# Altium PCB PCB1.PcbDoc
Units mm, origin at the board's own origin, x right, y up, seen from the top; angles counter-clockwise.
Board outline 52.7 x 67.69 mm, 4 copper layers (Top Layer, Internal Plane 1, Internal Plane 2, Bottom Layer), stack 0.462 mm thick; 20 components, 14 nets, 54 pads, 0 vias.
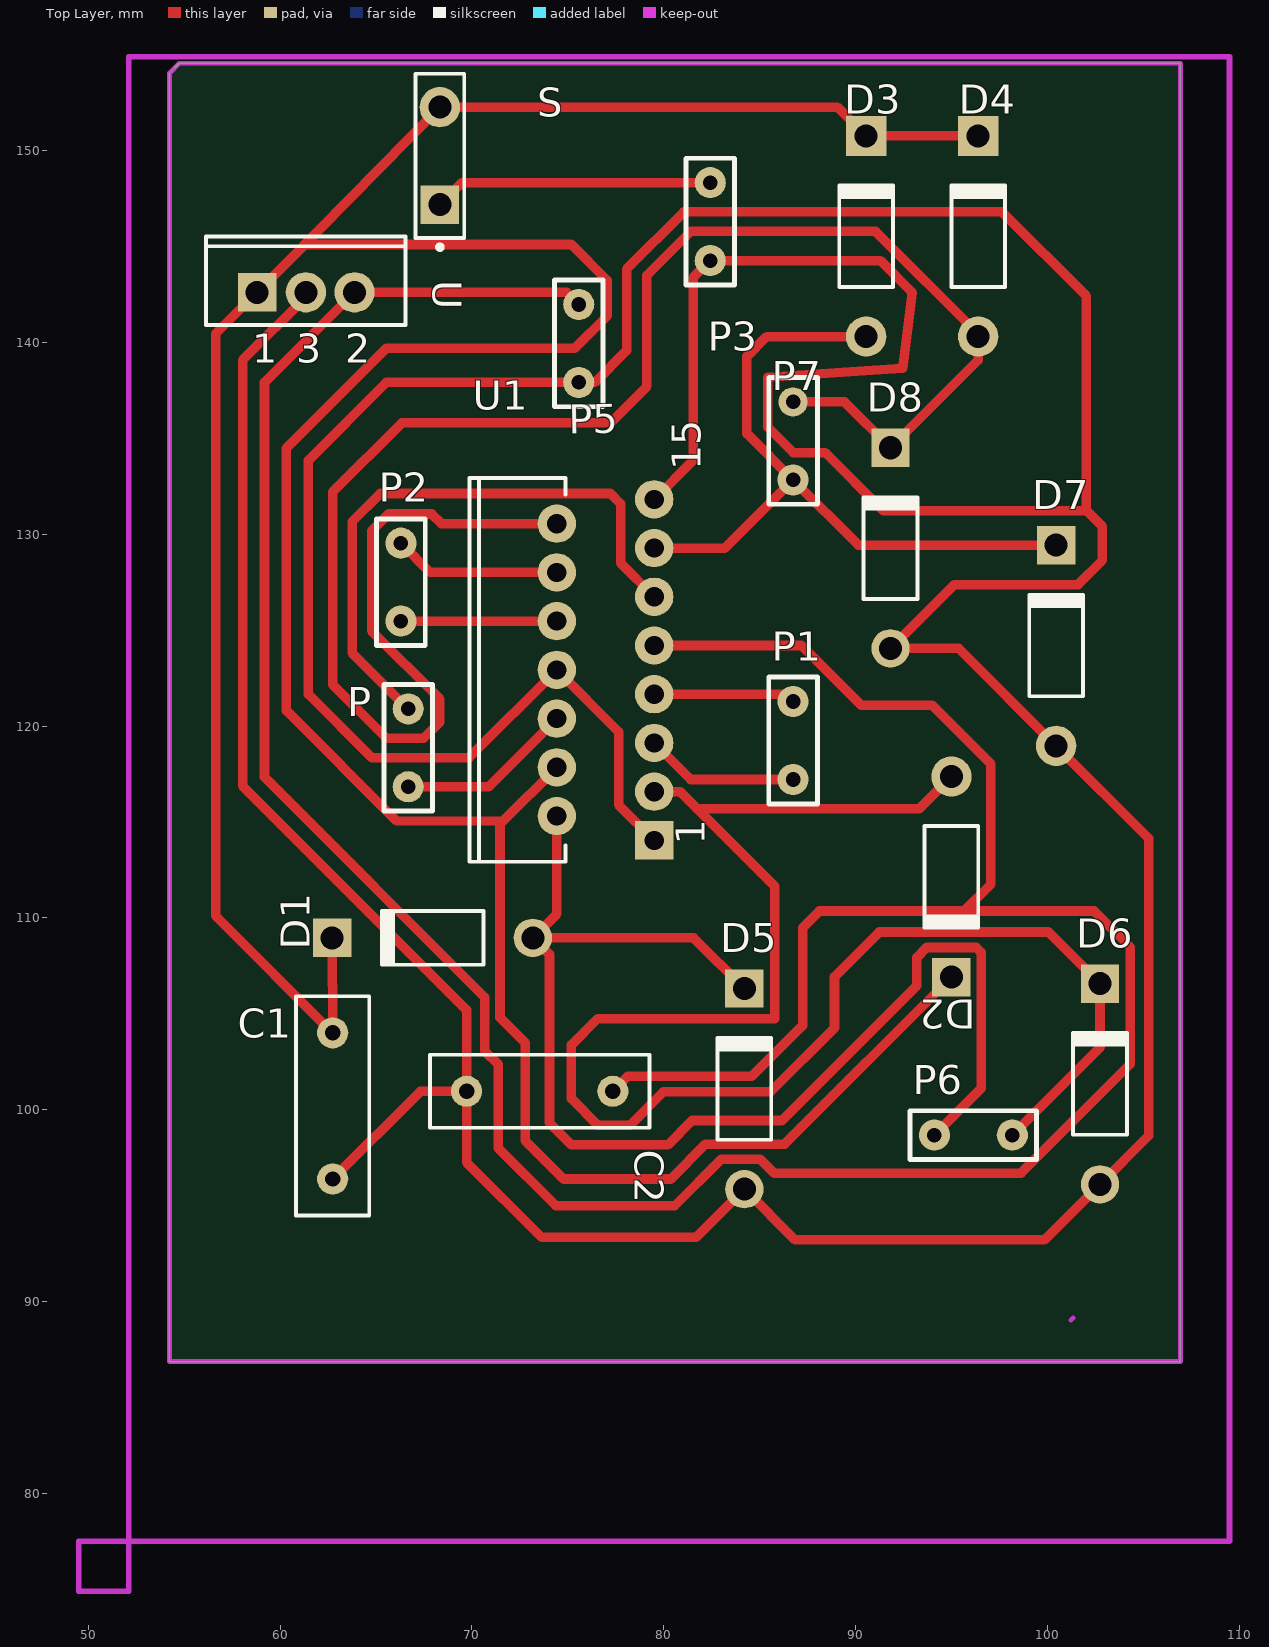
[diagram p0: Top Layer view]
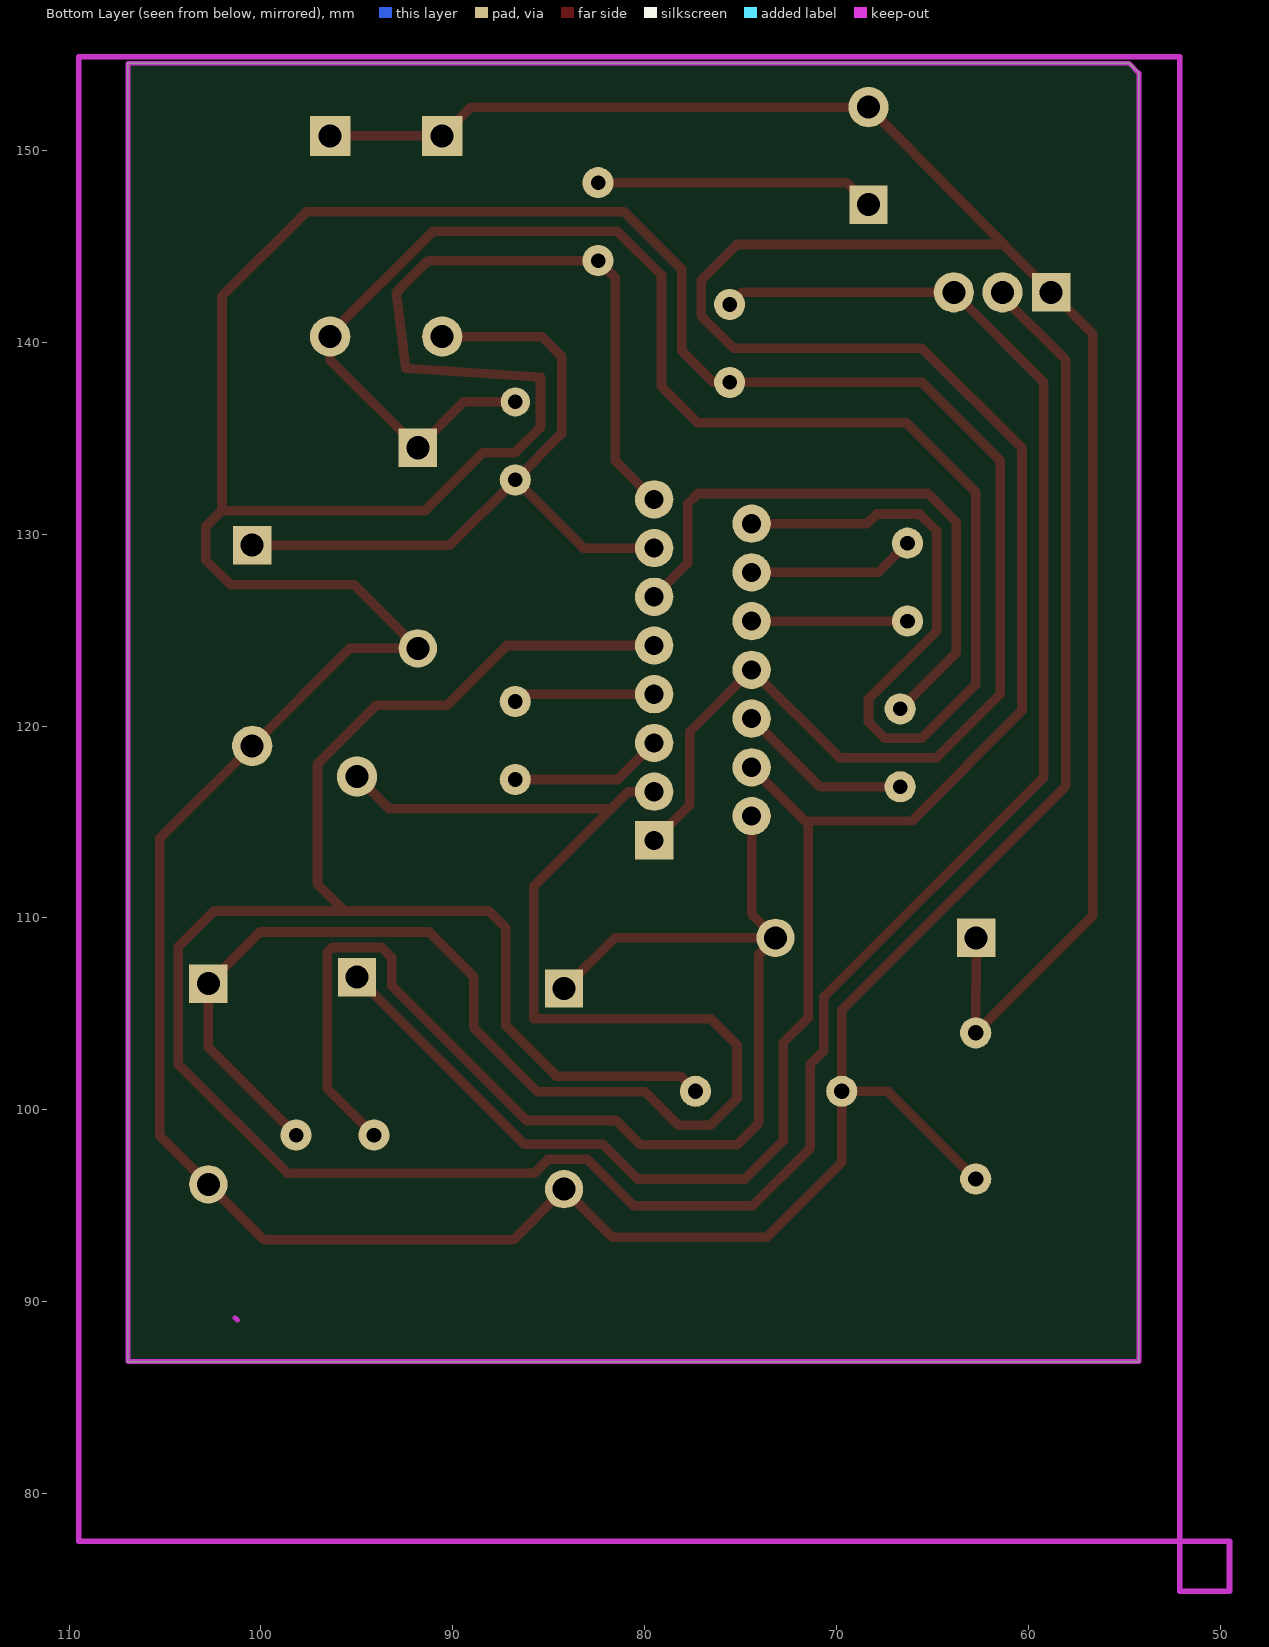
[diagram p1: Bottom Layer view, seen from below]
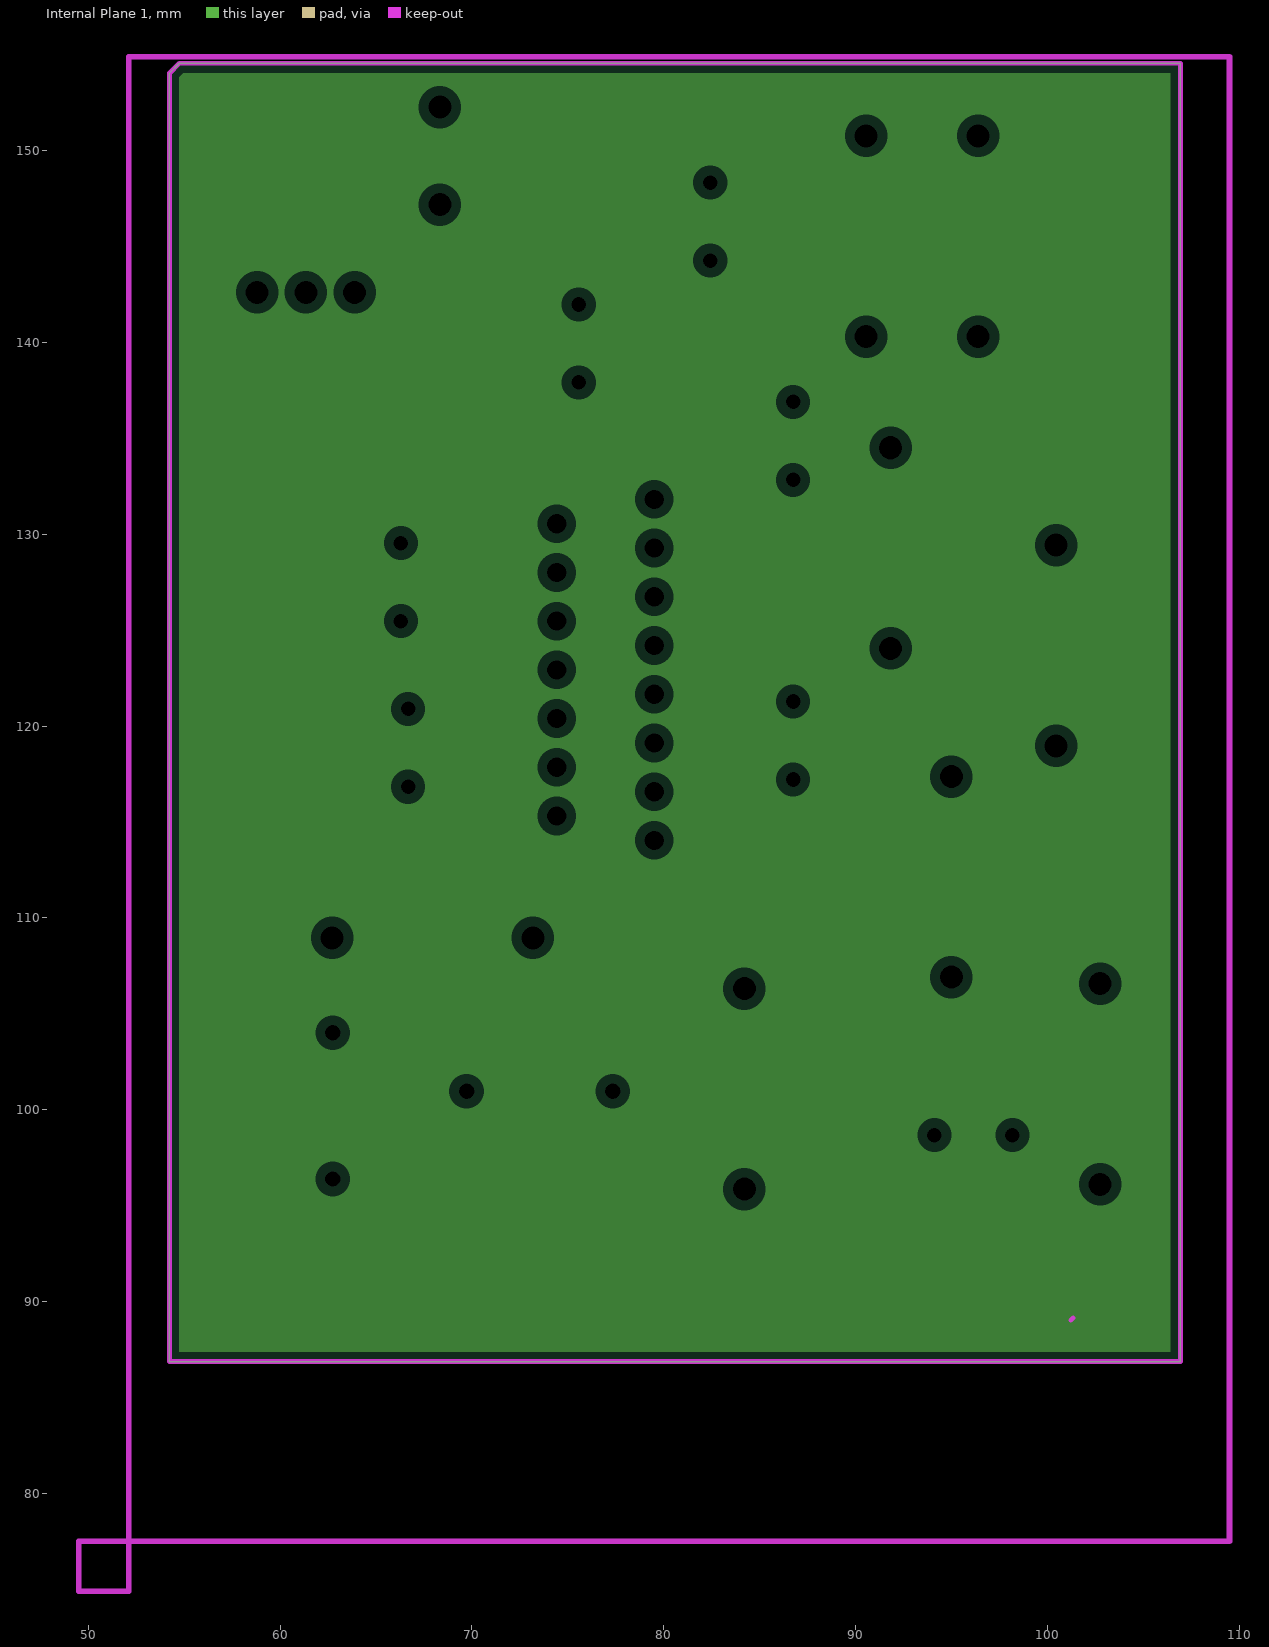
[diagram p2: Internal Plane 1, clearances drawn from the general rule]
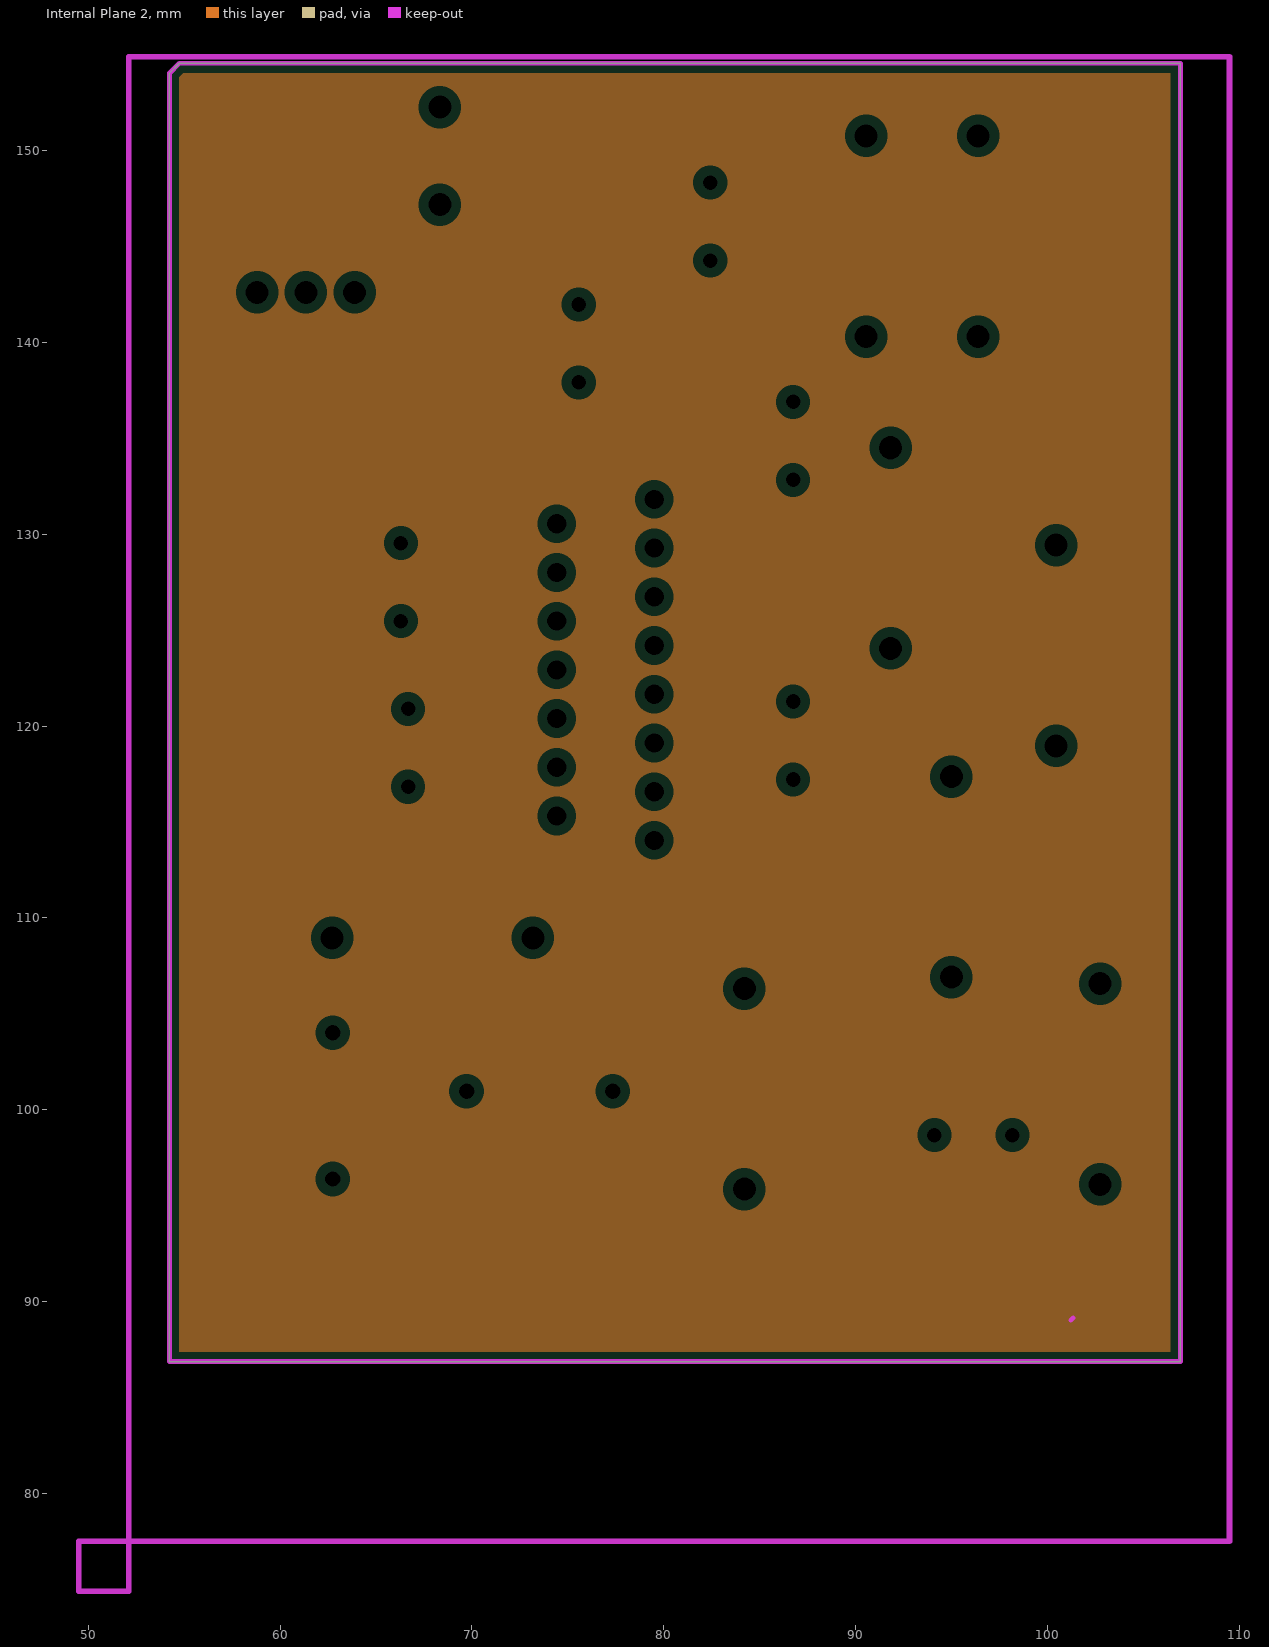
[diagram p3: Internal Plane 2, clearances drawn from the general rule]

## Layer stack, top to bottom
Top Solder: solder mask 0.0102, Solder Resist, Dk 3.5
Top Layer: signal copper 0.0356
Internal Plane 1: plane copper 0.0356
Internal Plane 2: plane copper 0.0356
Dielectric 1: dielectric 0.32, FR-4, Dk 4.8
Bottom Layer: signal copper 0.0356
Bottom Solder: solder mask 0.0102, Solder Resist, Dk 3.5

## Board outline
54.229,86.868 54.229,154.051 54.737,154.559 106.934,154.559 106.934,86.868

## Design rules (kind name [scope] priority, off if disabled: settings)
Clearance [All] p1: gap=0.3
PlaneClearance [All] p1: clearance=0.508
PlaneConnect [All] p1: planeconnectstyle=Relief reliefexpansion=0.508 reliefentries=4 reliefconductorwidth=0.254 reliefairgap=0.254
PolygonConnect [All] p1: connectstyle=Relief reliefconductorwidth=0.254 reliefentries=4 polygonreliefangle="90 Angle" airgapwidth=0.254
RoutingLayers [All] p1: top layer_v5=TRUE bottom layer_v5=FALSE
RoutingVias [All] p1: holewidth=0.6 width=1 viastyle="Through Hole" minholewidth=0.711 minwidth=1.27 maxholewidth=0.711 maxwidth=1.27
SMDNeckDown [All] p1: percent=50.000
SolderMaskExpansion [All] p1: expansion=0.102
Width [All] p1: maxlimit=0.8 minlimit=0.2 preferedwidth=0.5 bottomlayer_prefwidth=0.4 minimp=50.000000 maximp=50.000000 favimp=50.000000
27 further rules are at their usual default settings.

## Components (designator, comment, footprint, x,y, rotation, side; value= is the part's Value field where it differs from the comment)
C1 "Cap" RAD-0.3#1 62.738,100.203 r90 top
C2 "Cap" RAD-0.3#2 73.533,100.965 r0 top
D1 "Diode 1N4007" DO-41#1 67.945,108.966 r180 top
D2 "Diode 1N4007" DO-41#2 94.996,112.141 r270 top
D3 "Diode 1N4007" DO-41#3 90.551,145.542 r90 top
D4 "Diode 1N4007" DO-41#3 96.393,145.542 r90 top
D5 "Diode 1N4007" DO-41#1 84.201,101.092 r90 top
D6 "Diode 1N4007" DO-41#1 102.743,101.346 r90 top
D7 "Diode 1N4007" DO-41#2 100.457,124.206 r90 top
D8 "Diode 1N4007" DO-41#1 91.821,129.286 r90 top
P "PWM" header#1 66.675,120.904 r270 top
P1 "Header 2" header#1 86.741,121.285 r270 top
P2 "Header 2" header#1 66.294,129.54 r270 top
P3 "+9V" header#1 82.423,144.272 r90 top
P5 "Header 2" header#1 75.565,141.986 r270 top
P6 "Header 2" header#1 94.107,98.679 r0 top
P7 "Header 2" header#2 86.741,132.842 r90 top
S "SW-PB" SPST-2 68.326,149.733 r90 top
U "L7805CV" TO220ABN 61.341,142.621 r0 top
U1 "L298N" Multiwatt15V 76.962,122.936 r90 top

## Footprints (in the part's own frame and the unit in brackets; to place one, negate y for a bottom-side part, rotate by r counter-clockwise, add the part's x,y. Pads: shape width x height; smd on the part's side, far side on the other; paste and mask are expansions set on the pad)
DO-41#1 [mm] "Diode, Axial; Body 5.2 x 2.7 mm (LxDia. max), Lead Dia. 0.86 mm (max)"
  round 2 hole 1.2: 1(-5.23,0)
  rect 2x2 hole 1.2: 2(5.23,0)
  silkscreen extent -2.65,-1.4 2.75,1.4
DO-41#2 [mm] "Diode, Axial; Body 5.2 x 2.7 mm (LxDia. max), Lead Dia. 0.86 mm (max)"
  round 2.1 hole 1.2: 1(-5.23,0)
  rect 2x2 hole 1.2: 2(5.23,0)
  silkscreen extent -2.65,-1.4 2.75,1.4
DO-41#3 [mm] "Diode, Axial; Body 5.2 x 2.7 mm (LxDia. max), Lead Dia. 0.86 mm (max)"
  round 2.1 hole 1.2: 1(-5.23,0)
  rect 2.1x2.1 hole 1.2: 2(5.23,0)
  silkscreen extent -2.65,-1.4 2.75,1.4
header#1 [mil]
  round 63.94 hole 30: 1(0,0) 2(160,0)
  silkscreen extent -50,-50 210,50
header#2 [mil]
  round 63.94 hole 30: 1(0,0)
  round 60 hole 30: 2(160,0)
  silkscreen extent -50,-50 210,50
Multiwatt15V [mm] "TO, Thru-Hole, Vertical, Heatsink Mounted; 15 Bent Staggered Leads; Pitch 1.27 mm"
  rect 2x2 hole 1: 1(-8.89,-2.54)
  round 2 hole 1: 2(-7.62,2.54) 3(-6.35,-2.54) 4(-5.08,2.54) 5(-3.81,-2.54) 6(-2.54,2.54) 7(-1.27,-2.54) 8(0,2.54) 9(1.27,-2.54) 10(2.54,2.54) 11(3.81,-2.54) 12(5.08,2.54) 13(6.35,-2.54) 14(7.62,2.54) 15(8.89,-2.54)
  silkscreen extent -10,2.09 10,7.09
RAD-0.3#1 [mm] "Radial Cap, Thru-Hole; 2 Leads; 0.3 in Pin Spacing"
  round 1.625 hole 0.8: 1(-3.81,0) 2(3.81,0)
  silkscreen extent -5.71,-1.91 5.71,1.91
RAD-0.3#2 [mm] "Radial Cap, Thru-Hole; 2 Leads; 0.3 in Pin Spacing"
  round 1.625 hole 0.8: 1(-3.81,0)
  round 1.624 hole 0.8: 2(3.81,0)
  silkscreen extent -5.71,-1.91 5.71,1.91
SPST-2 [mm] "Switch; 2 Leads"
  rect 2x2 hole 1.2: 1(-2.54,0)
  round 2.1 hole 1.2: 2(2.54,0)
  silkscreen extent -4.89,-1.27 4.28,1.27
TO220ABN [mm] "TO, Thru-Hole, Vertical, Heatsink Mounted; 3 In-Line Leads; Pitch 2.54 mm; Pin sequence 1, 3, 2"
  rect 2x2 hole 1.2: 1(-2.54,0)
  round 2.1 hole 1.2: 2(2.54,0) 3(0,0)
  silkscreen extent -5.2,-1.7 5.2,2.9

## Part data
C1 C2: "Capacitor"
D1 D2 D3 D4 D5 D6 D7 D8: "1 Amp General Purpose Rectifier"
P P3: library part "Header 2", "Header, 2-Pin"
P1 P2 P5 P6 P7: "Header, 2-Pin"
S: "Switch"
U: "Positive Voltage Regulator"
U1: "Dual Full Bridge Driver"

## Nets (pads, with @x,y where several pads share a name; then routed paths per layer and width w, separated by ;. In a path a pad name is that pad's centre, name@x,y a point inside that pad or via, vN(x,y) a via of type N, cw(c..) or ccw(c..) an arc to the next point about the centre after c; other vN are vias at no path point)
GND: C1.1 C2.1 D5.1 D6.1 D7.1 D8.1 P3.1 P5.2 U1.1 U1.8 U1.15 U.3 | length 308.7
  Top Layer w0.5: U.3 61.341,142.383 58.039,139.081 58.039,116.891 69.723,105.207 C2.1 ; C1.1 67.31,100.965 C2.1 ; U1.1 77.648,115.9 77.648,119.71 U1.8 69.85,118.364 64.77,118.364 61.468,121.666 61.468,133.858 65.532,137.922 P5.2 76.411,137.922 78.067,139.578 78.067,143.828 81.051,146.812 97.638,146.812 102.032,142.418 102.032,131.242 ; U1.15 81.534,133.858 81.534,143.383 P3.1 91.288,144.272 92.953,142.607 92.456,138.659 85.429,138.185 85.429,135.585 86.75,134.264 88.417,134.264 91.44,131.242 102.032,131.242 ; C2.1 69.723,97.259 73.637,93.345 81.684,93.345 D5.1 86.845,93.218 99.845,93.218 D6.1 105.283,98.656 105.283,114.15 D7.1 95.377,124.056 D8.1 95.146,127.381 101.6,127.381 102.87,128.651 102.87,130.404 102.032,131.242
NetC2_2: C2.2 P5.1 U1.9 U.2 | length 170.5
  Top Layer w0.5: P5.1 74.93,142.621 U.2 59.182,137.922 59.182,117.348 70.663,105.867 70.663,103.073 71.374,102.362 71.374,97.993 74.371,94.996 80.571,94.996 82.987,97.412 85.036,97.412 85.75,96.698 98.628,96.698 104.318,102.387 104.318,108.483 102.438,110.363 95.656,110.363 ; C2.2 78.13,101.752 84.595,101.752 87.236,104.394 87.236,109.487 88.113,110.363 95.656,110.363 ; U1.9 87.173,124.206 90.297,121.082 94.005,121.082 97.053,118.034 97.053,111.76 95.656,110.363
NetD1_1: D1.1 D5.2 P6.1 U1.2 | length 67.7
  Top Layer w0.5: U1.2 74.422,110.213 D1.1 ; D5.2 81.557,108.966 D1.1 ; P6.1 96.546,101.118 96.546,108.204 96.289,108.461 93.703,108.461 93.192,107.95 93.192,106.477 86.156,99.441 81.48,99.441 80.21,98.171 75.184,98.171 74.041,99.314 74.041,108.1 D1.1
NetD2_1: D2.1 D6.2 P6.2 U1.3 | length 87.9
  Top Layer w0.5: U1.3 80.848,116.586 81.737,115.697 ; D2.1 93.322,115.697 81.737,115.697 ; P6.2 102.743,103.251 D6.2 100.048,109.271 91.237,109.271 88.9,106.934 88.9,104.267 85.573,100.94 79.985,100.94 78.232,99.187 76.581,99.187 75.184,100.584 75.184,103.378 76.556,104.75 85.776,104.75 85.776,111.658 81.737,115.697
NetD3_1: D3.1 D7.2 P7.1 U1.13 | length 37.9
  Top Layer w0.5: U1.13 83.185,129.286 P7.1 ; D3.1 85.361,140.312 84.328,139.279 84.328,135.255 P7.1 ; D7.2 90.147,129.436 P7.1
NetD4_1: D4.1 D8.2 P7.2 U1.14 | length 97.6
  Top Layer w0.5: U1.14 68.402,130.556 67.894,131.064 65.659,131.064 64.77,130.175 64.77,124.968 68.326,121.412 68.326,120.218 67.488,119.38 65.532,119.38 62.738,122.174 62.738,132.207 66.341,135.81 77.216,135.81 79.121,137.715 79.121,143.51 81.407,145.796 91.038,145.796 96.393,140.441 D4.1 96.393,139.088 D8.2 89.431,136.906 P7.2
NetP1_1: P1.1 U1.7 | length 7.4
  Top Layer w0.5: U1.7 86.36,121.666 P1.1
NetP1_2: P1.2 U1.5 | length 8
  Top Layer w0.5: U1.5 81.407,117.221 P1.2
NetP2_1: P2.1 U1.12 | length 8.8
  Top Layer w0.5: P2.1 67.818,128.016 U1.12
NetP2_2: P2.2 U1.10 | length 8.1
  Top Layer w0.5: P2.2 U1.10
NetP3_2: P3.2 S.1 | length 14.6
  Top Layer w0.5: S.1 69.469,148.336 P3.2
NetP_1: P.1 U1.11 | length 31.4
  Top Layer w0.5: P.1 63.754,123.825 63.754,130.658 65.227,132.131 77.216,132.131 77.749,131.597 77.749,128.499 U1.11
NetP_2: P.2 U1.6 | length 9.2
  Top Layer w0.5: P.2 70.866,116.84 U1.6
VCC: C1.2 D1.2 D2.2 D3.2 D4.2 S.2 U1.4 U.1 | length 204.4
  Top Layer w0.5: D1.2 62.715,106.5 62.738,106.477 C1.2 56.642,110.109 56.642,140.462 U.1 60.402,144.222 ; U1.4 71.603,115.037 ; D2.2 86.297,98.212 82.185,98.212 80.366,96.393 74.778,96.393 72.771,98.4 72.771,103.505 71.463,104.813 71.463,114.897 71.603,115.037 ; D4.2 D3.2 89.05,152.273 S.2 60.402,144.222 ; 60.402,144.222 61.29,145.11 75.184,145.11 77.051,143.243 77.051,141.394 75.353,139.696 65.528,139.696 60.325,134.493 60.325,120.807 66.07,115.062 71.603,115.037

## Keep-outs
Keep-Out Layer:
  lines w0.254: 101.219,89.027 101.346,89.154 ; 54.229,86.868 54.229,154.051 54.737,154.559 106.934,154.559 106.934,86.868 54.229,86.868
  lines w0.3: 52.1,77.5 52.1,154.9 109.5,154.9 109.5,77.5 52.1,77.5 ; 52.1,77.5 52.1,74.9 49.5,74.9 49.5,77.5 52.1,77.5

## Silkscreen, mask and mechanical layers (free items; w line width, h text height)
Drill Drawing:
  text ".LEGEND" at 115.88,81.28 h1.52
  text "Drill Drawing." at 115.88,78.74 h1.52

## Dimensions
50.8,76.2 to 52.1,77.5 on Mechanical 1
50.8,76.2 to 52.1,77.5 on Mechanical 1

## Text inside footprints (layer, text, board x,y; h text height)
U: Top Overlay "3" at 60.841,138.946 h1.5; Top Overlay "2" at 63.381,138.946 h1.5; Top Overlay "1" at 58.551,138.946 h1.5
U1: Top Overlay "1" at 82.127,113.816 h1.5 r90; Top Overlay "15" at 81.915,133.35 h1.5 r90